# Altium PCB MATRIX_CLOCK.PcbDoc
Units mm, origin at the board's own origin, x right, y up, seen from the top; angles counter-clockwise.
Board outline 50.01 x 39.22 mm, 2 copper layers (Top Layer, Bottom Layer); 36 components, 29 nets, 152 pads, 86 vias.
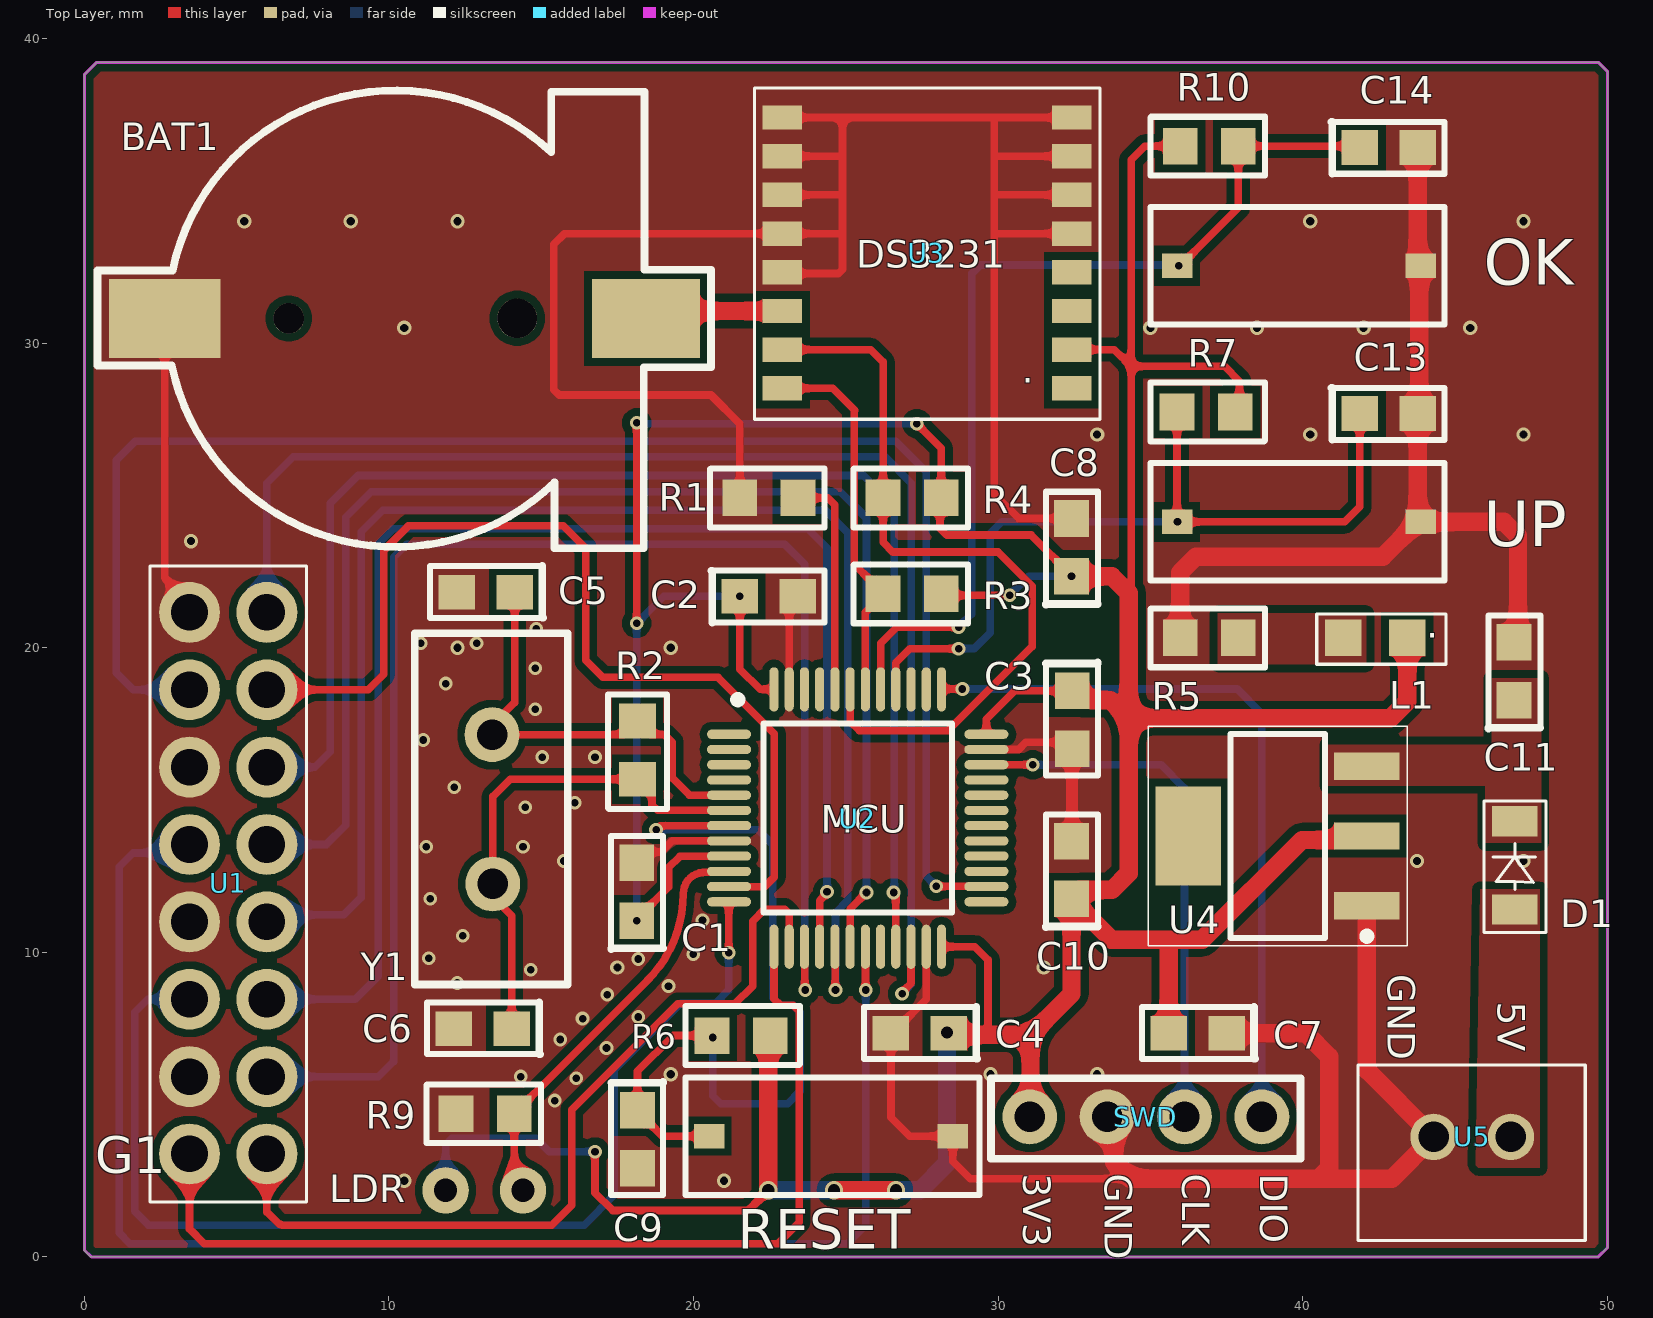
[diagram p0: Top Layer view]
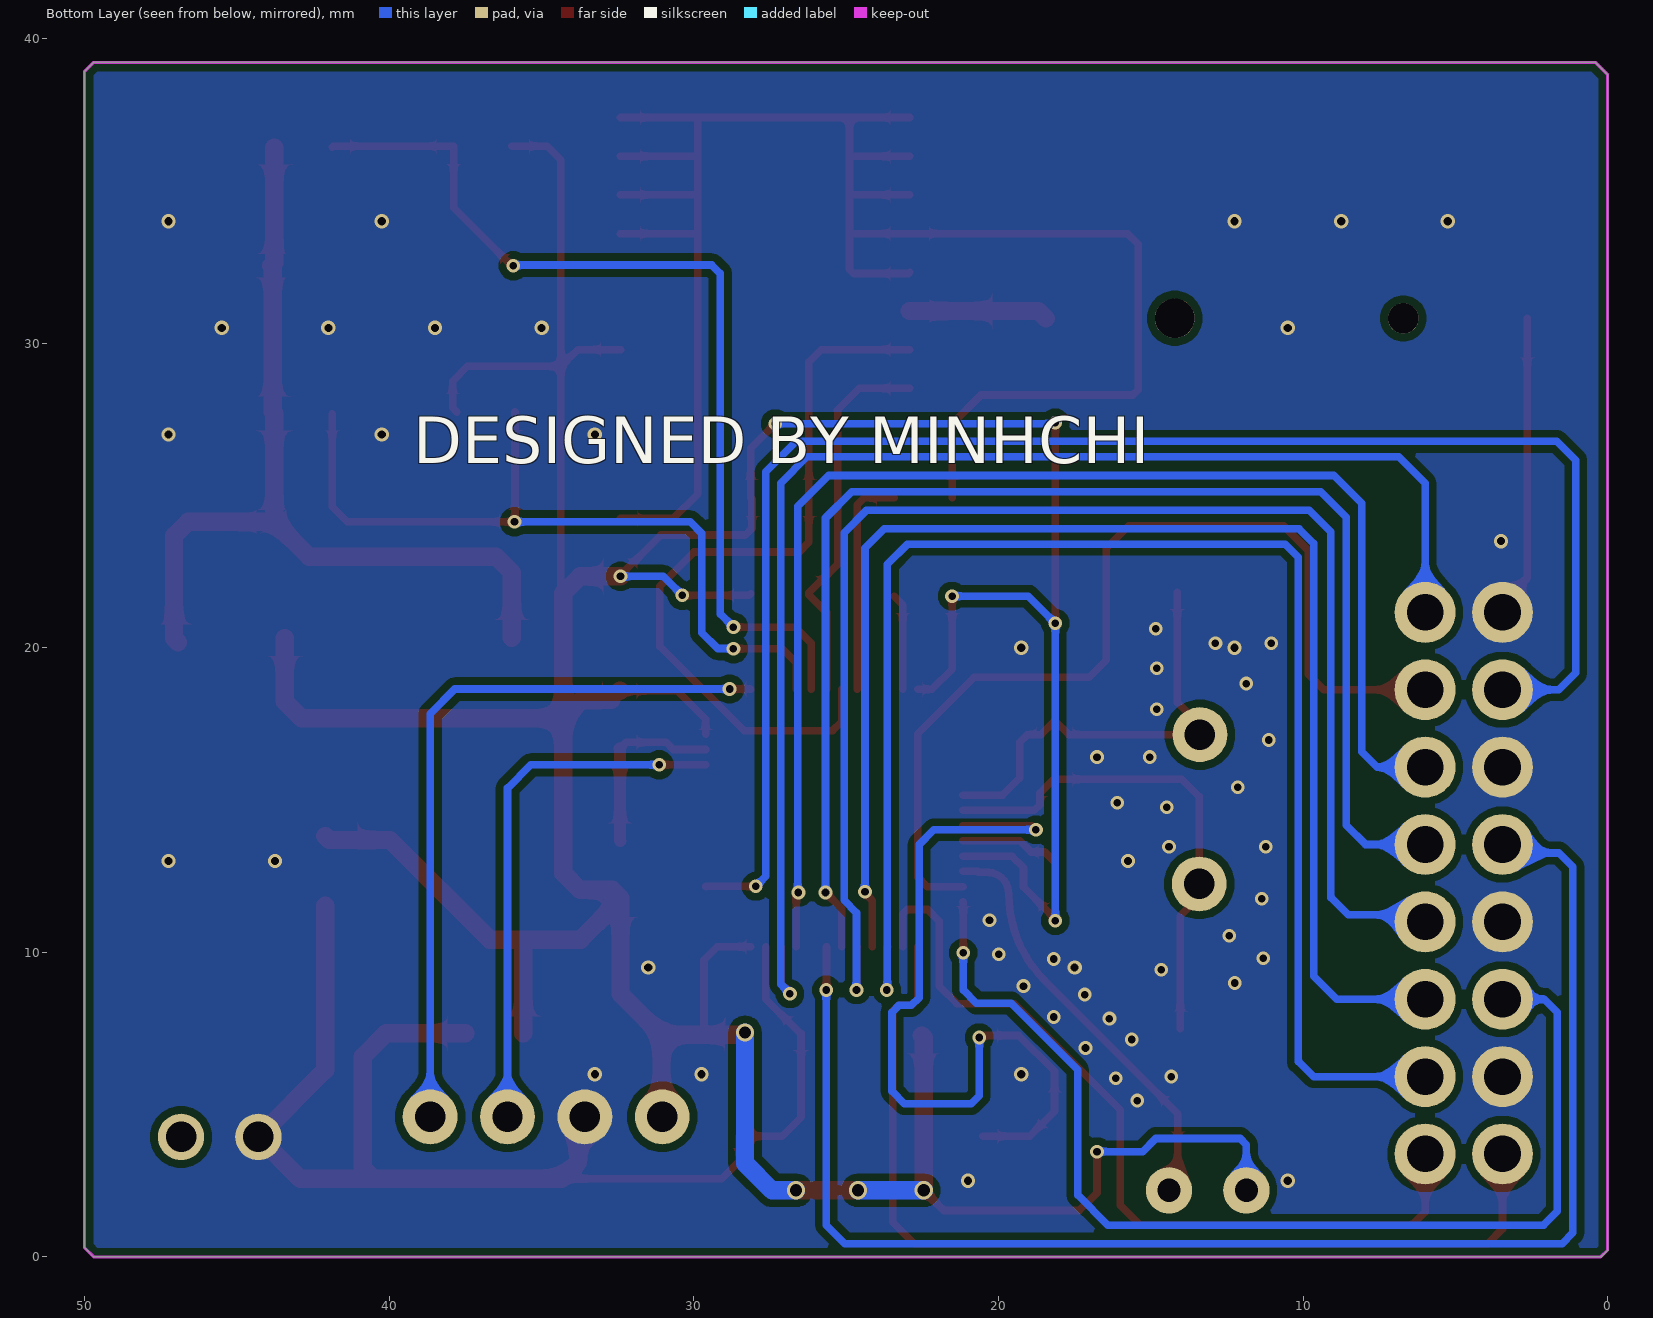
[diagram p1: Bottom Layer view, seen from below]
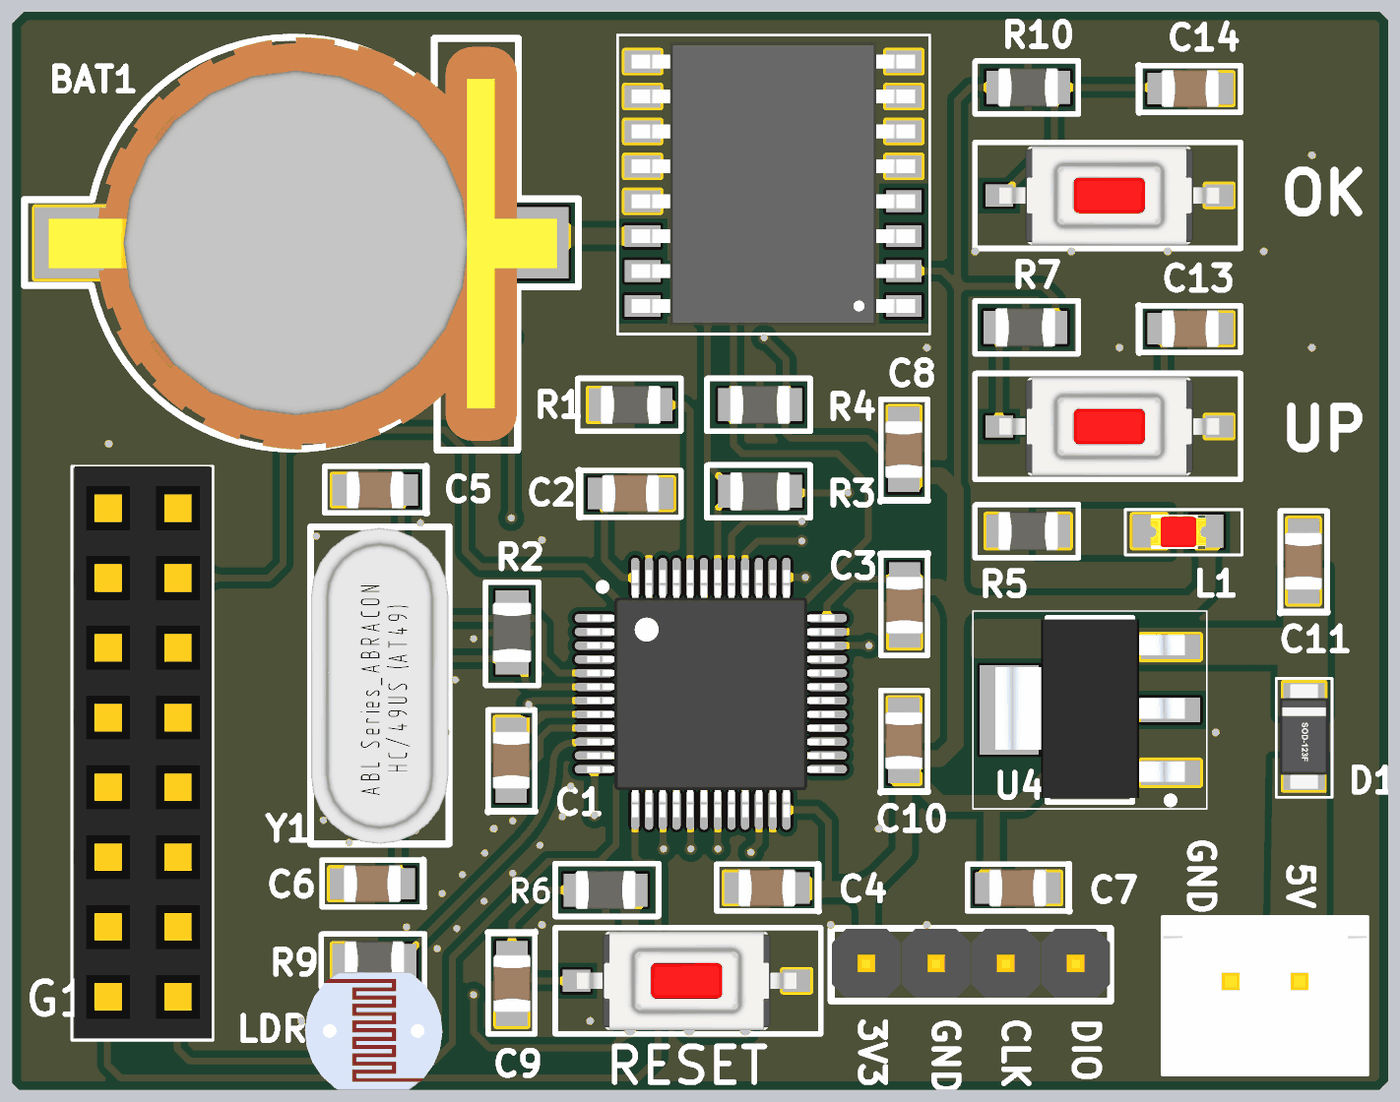
[diagram p2: 3D render of the assembled board from above, using the file's embedded part models]

## Layer stack, top to bottom
Top Solder: solder mask 0.0102, Solder Resist, Dk 3.5
Top Layer: signal copper 0.0356
Dielectric 1: dielectric 0.32, FR-4, Dk 4.8
Bottom Layer: signal copper 0.0356
Bottom Solder: solder mask 0.0102, Solder Resist, Dk 3.5

## Board outline
0.229,0 0,0.229 0,38.811 0.406,39.218 49.708,39.218 50.013,38.913 50.013,0.305 49.708,0

## Design rules (kind name [scope] priority, off if disabled: settings)
Clearance [All] p1: gap=0.25 ignorepadtopadclearanceinfootprint=FALSE
PolygonConnect [All] p1: connectstyle=Direct reliefconductorwidth=0.4 reliefentries=4 polygonreliefangle="90 Angle" airgapwidth=0.3
RoutingVias [All] p1: holewidth=0.25 width=0.45 viastyle="Through Hole" minholewidth=0.25 minwidth=0.45 maxholewidth=0.4 maxwidth=0.8
SolderMaskExpansion [All] p1: expansion=0.102 istentingtop=FALSE
Width [All] p1: maxlimit=0.6 minlimit=0.25 preferedwidth=0.4
30 further rules are at their usual default settings.

## Components (designator, comment, footprint, x,y, rotation, side; value= is the part's Value field where it differs from the comment)
BAT1 "BAT" CR11220 10.211,30.81 r0 top
C1 "104" CAP-0805 18.134,11.989 r90 top
C2 "104" CAP-0805 22.473,21.692 r0 top
C3 "104" CAP-0805 32.436,17.63 r270 top
C4 "104" CAP-0805 27.432,7.341 r180 top
C5 "20pF" CAP-0805 13.183,21.819 r180 top
C6 "20pF" CAP-0805 13.081,7.493 r180 top
C7 "104" CAP-0805 36.551,7.341 r180 top
C8 "104" CAP-0805 32.41,23.292 r90 top
C9 "104" CAP-0805 18.159,3.861 r270 top
C10 "10uF" CAP-0805 32.41,12.7 r90 top
C11 "10uF" CAP-0805 46.939,19.229 r90 top
C13 "104" CAP-0805 42.824,27.686 r0 top
C14 "104" CAP-0805 42.824,36.424 r0 top
D1 "IN5819" IN5819 46.965,11.405 r90 top
L1 "R" LED-R 43.433,20.32 r180 top
LDR "LDR" LDR2 14.402,2.184 r180 top (schematic designator R8)
OK "OK" BUTTON-2P-SMD 39.878,32.537 r0 top (schematic designator BT3)
R1 "10K" RES-0805 22.473,24.917 r0 top
R2 "1M" RES-0805 18.161,16.637 r90 top
R3 "10K" RES-0805 27.178,21.766 r0 top
R4 "10K" RES-0805 27.178,24.917 r0 top
R5 "510R" RES-0805 36.932,20.324 r0 top
R6 "10K" RES-0805 21.565,7.266 r180 top
R7 "10K" RES-0805 36.83,27.737 r180 top
R9 "10K" RES-0805 13.159,4.699 r0 top
R10 "10K" RES-0805 36.932,36.466 r0 top
RESET "RESET" BUTTON-2P-SMD 24.511,3.962 r180 top (schematic designator BT1)
SWD "HEADER-4P" HEADER-4P 31.039,4.596 r0 top
U1 "Header 16P" HEADER16P 5.994,3.378 r90 top
U2 "STM32F103" LQFP-48 25.391,14.407 r0 top
U3 "DS3231" SOIC16-W 32.411,37.405 r180 top
U4 "AMS1117" SOT-223 39.176,13.818 r180 top
U5 "CONNECTOR" XH-2P 46.838,3.937 r180 top
UP "UP" BUTTON-2P-SMD 39.878,24.13 r0 top (schematic designator BT2)
Y1 "8Mhz" QUARTZ 13.411,12.243 r90 top

## Footprints (in the part's own frame and the unit in brackets; to place one, negate y for a bottom-side part, rotate by r counter-clockwise, add the part's x,y. Pads: shape width x height; smd on the part's side, far side on the other; paste and mask are expansions set on the pad)
BUTTON-2P-SMD [mm] "3.5x6mm"
  rect 1x0.8 smd: 1(-4,0) 2(4,0)
  silkscreen extent -4.88,-1.93 4.78,1.93, body extent -4,-1.8 4,1.8, height 2.5
CAP-0805 [mm]
  rect 1.2x1.14 smd: 1(-0.95,0) 2(0.95,0)
  silkscreen extent -1.88,-0.86 1.83,0.84, body extent -1.05,-0.67 1.05,0.67, height 0.95
CR11220 [mm] "SMD"
  round 1.3 hole 1.3: 0.1(4,0)
  round 1 hole 1 paste+0 mask+0.102: 0.2(-3.5,0)
  rect 3.54x2.6 smd: 1(8.23,0)
  rect 3.66x2.6 smd: 2(-7.57,0)
  silkscreen extent -9.78,-7.54 10.36,7.48, body extent -8.9,-7.52 9.6,7.47, height 4.05
HEADER16P [mm] "DOUBLE"
  round 2 hole 1.2: 1(0,0) 2(0,2.54) 3(2.54,0) 4(2.54,2.54) 5(5.08,0) 6(5.08,2.54) 7(7.62,0) 8(7.62,2.54) 9(10.16,0) 10(10.16,2.54) 11(12.7,0) 12(12.7,2.54) 13(15.24,0) 14(15.24,2.54) 15(17.78,0) 16(17.78,2.54)
  silkscreen extent -1.57,-1.3 19.3,3.84, body extent -1.52,-1.25 19.3,3.75, height 8.5
HEADER-4P [mm] "DIP"
  round 1.8 hole 1: 1(0,0) 2(2.54,0) 3(5.08,0) 4(7.62,0)
  silkscreen extent -1.27,-1.37 8.89,1.27, body extent -1.25,-1.25 8.87,1.25, height 8.54
IN5819 [mm] "SMD"
  rect 1x1.5 smd: 1(0,0) 2(2.9,0)
  silkscreen extent -0.76,-1.02 3.56,1.02, body extent -0.45,-0.9 3.35,0.9, height 1.02
LDR2 [mil]
  round 60 hole 30: 1(0,0) 2(100,0)
  body extent -48,-83 148,87, height 276
LED-R [mm] "0805"
  rect 1.2x1.2 smd: 1(0,0) 2(2.1,0)
  silkscreen extent -1.27,-0.79 2.97,0.86, body extent 0.03,-0.6 2.05,0.65, height 1.1
LQFP-48 [mm] "SMD"
  oval 1.45x0.3 smd: 1(-4.225,2.75) 2(-4.225,2.25) 3(-4.225,1.75) 4(-4.225,1.25) 5(-4.225,0.75) 6(-4.225,0.25) 7(-4.225,-0.25) 8(-4.225,-0.75) 9(-4.225,-1.25) 10(-4.225,-1.75) 11(-4.225,-2.25) 12(-4.225,-2.75) 25(4.225,-2.75) 26(4.225,-2.25) 27(4.225,-1.75) 28(4.225,-1.25) 29(4.225,-0.75) 30(4.225,-0.25) 31(4.225,0.25) 32(4.225,0.75) 33(4.225,1.25) 34(4.225,1.75) 35(4.225,2.25) 36(4.225,2.75)
  oval 0.3x1.45 smd: 13(-2.75,-4.225) 14(-2.25,-4.225) 15(-1.75,-4.225) 16(-1.25,-4.225) 17(-0.75,-4.225) 18(-0.25,-4.225) 19(0.25,-4.225) 20(0.75,-4.225) 21(1.25,-4.225) 22(1.75,-4.225) 23(2.25,-4.225) 24(2.75,-4.225) 37(2.75,4.225) 38(2.25,4.225) 39(1.75,4.225) 40(1.25,4.225) 41(0.75,4.225) 42(0.25,4.225) 43(-0.25,4.225) 44(-0.75,4.225) 45(-1.25,4.225) 46(-1.75,4.225) 47(-2.25,4.225) 48(-2.75,4.225)
  silkscreen extent -4.06,-3.1 3.1,4.01, body extent -4.5,-4.5 4.5,4.5, height 1.6
QUARTZ [mm] "8MHZ-DIP"
  round 1.8 hole 1: 1(0,0) 2(4.902,0.025)
  silkscreen extent -3.3,-2.46 8.23,2.57, body extent -3.3,-2.44 8.2,2.56, height 3.51
RES-0805 [mm]
  rect 1.14x1.2 smd: 1(-0.955,0) 2(0.955,0)
  silkscreen extent -1.93,-0.97 1.83,0.97, body extent -1.1,-0.7 1.1,0.7, height 1.3
SOIC16-W [mm] "SMD"
  rect 1.3x0.8 smd: 1(0,8.89) 2(0,7.62) 3(0,6.35) 4(0,5.08) 5(0,3.81) 6(0,2.54) 7(0,1.27) 8(0,0) 9(9.5,0) 10(9.5,1.27) 11(9.5,2.54) 12(9.5,3.81) 13(9.5,5.08) 14(9.5,6.35) 15(9.5,7.62) 16(9.5,8.89)
  silkscreen extent -0.94,-0.97 10.41,9.91, body extent -0.4,-0.7 9.9,9.59, height 2.65
SOT-223 [mm]
  rect 2.15x0.9 smd: 1(-2.93,2.29) 2(-2.93,0) 3(-2.93,-2.29)
  rect 2.15x3.25 smd: 4(2.93,0)
  silkscreen extent -4.25,-3.6 4.25,3.6, body extent -3.45,-3.3 3.45,3.2, height 1.7
XH-2P [mil]
  round 60 hole 39.37: 1(0,0) 2(100,0)
  silkscreen extent -96,-93 198,134, body extent -95,-93 196,134, height 276

## Part data
BAT1: library part BAT_CR1220
C1 C2 C3 C4 C5 C6 C7 C8 C9 C10 C11 C13 C14: library part CAP-NON
D1: library part DIODE
L1: library part LED-SINGLE
OK RESET UP: library part BUTON-2P
R1 R2 R3 R4 R5 R6 R7 R9 R10: library part RES
U1: library part "CONNECTOR 16P"
U2: library part STM32F103_MCU
U4: library part AMS1117_SOT-232
U5: library part XH-2P
Y1: library part Quartz

## Via types
v1: diameter 0.45, hole 0.25, Top Layer to Bottom Layer, tented both sides, 56 vias
v2: diameter 0.47, hole 0.27, Top Layer to Bottom Layer, tented both sides, 26 vias
v3: diameter 0.6, hole 0.4, Top Layer to Bottom Layer, tented both sides, 4 vias

## Nets (pads, with @x,y where several pads share a name; then routed paths per layer and width w, separated by ;. In a path a pad name is that pad's centre, name@x,y a point inside that pad or via, vN(x,y) a via of type N, cw(c..) or ccw(c..) an arc to the next point about the centre after c; other vN are vias at no path point)
3V3: C1.1 C2.1 C3.1 C4.1 C7.2 C8.1 C10.1 L1.1 LDR.2 R3.2 R4.2 R6.1 R7.1 R10.1 SWD.1 U2.9 U2.24 U2.36 U2.48 U3.2 U4.2 | length 163.6
  Top Layer w0.25: v1(16.764,3.454) 16.764,2.108 17.348,1.524 21.793,1.524 v3(22.454,2.184) ; v1(18.134,11.039) cw(c18.277,11.039) 18.176,11.14 19.177,12.141 19.177,12.776 19.558,13.157 U2.9 ; v1(18.134,20.801) v1@18.134,27.381 ; v1(21.523,21.692) 21.523,19.294 22.186,18.632 U2.48 ; v1(27.33,27.356) 28.133,26.553 R4.2 28.092,24.877 28.092,23.927 28.321,23.698 31.084,23.698 32.41,22.372 v1(32.41,22.342) ; R3.2 28.182,21.717 v1(30.378,21.717) ; U2.24 29.239,10.182 29.667,9.754 29.667,7.595 29.388,7.315 ; U2.36 29.616,17.653 30.543,18.58 C3.1 ; U3.2 33.817,29.785 34.366,29.235 ; 34.29,21.793 34.366,21.869 34.366,29.235 ; R10.1 34.815,36.466 34.366,36.017 34.366,29.235 ; R7.1 37.922,27.874 37.922,28.753 37.44,29.235 34.366,29.235
  Top Layer w0.6: v3(22.454,2.184) 22.454,7.2 R6.1 ; v3(24.613,2.184) v3(26.645,2.184) ; C4.1@28.382,7.351 C4.1 28.433,7.29 31.064,7.29 ; SWD.1 31.064,4.621 31.064,7.29 ; v1(32.41,22.342) 33.741,22.342 34.29,21.793 34.29,17.683 ; C3.1@32.423,18.593 C3.1 ; C3.1@32.706,18.28 33.693,18.28 34.29,17.683 ; C7.2 35.601,10.373 35.56,10.414 ; U4.2 41.977,13.688 39.977,13.688 36.703,10.414 35.56,10.414 ; L1.1 43.433,18.236 42.879,17.683 34.29,17.683 ; 31.064,7.29 32.41,8.636 C10.1@32.41,11.72 ; C10.1@32.41,11.72 C10.1 32.41,11.78 32.68,12.05 33.742,12.05 34.29,12.598 34.29,17.683 ; C10.1@32.41,11.72 33.716,10.414 35.56,10.414
  Bottom Layer w0.25: LDR.2 11.862,3.683 12.065,3.886 14.834,3.886 15.265,3.454 v1(16.764,3.454) ; v1(18.134,11.039) v1(18.134,20.801) 19.025,21.692 v1(21.523,21.692) ; v1@18.145,27.356 v1(27.33,27.356) ; v1(30.378,21.717) 31.003,22.342 v1(32.41,22.342)
  Bottom Layer w0.6: v3(22.454,2.184) v3(24.613,2.184) ; v3(26.645,2.184) 27.432,2.184 28.321,3.073 v3(28.321,7.366)
  other v1: 18.136,27.381
+5: D1.1 U5.1
A: U1.9 U2.18 | length 44.6
  Top Layer w0.25: U2.18 25.141,11.425 v1(25.679,11.963)
  Bottom Layer w0.25: U1.9@6.502,13.538 7.95,13.538 8.585,14.173 8.585,24.282 9.423,25.121 24.816,25.121 25.679,24.257 v1(25.679,11.963)
A0: LDR.1 R9.2 U2.10 | length 14.2
  Top Layer w0.25: LDR.1@14.402,1.956 cw(c14.402,2.244) 14.114,2.244 R9.2 18.476,9.061 ccw(c15.608,11.931) 19.665,11.928 cw(c20.357,11.93) 20.306,12.619 20.67,12.635 20.67,12.657 U2.10
B: U1.10 U2.19 | length 48.7
  Top Layer w0.25: U2.19 25.648,10.176 25.648,8.769 v1(25.654,8.763)
  Bottom Layer w0.25: U1.10 3.175,13.26 1.601,13.26 1.143,12.802 1.143,0.787 1.499,0.432 25.044,0.432 25.654,1.041 v1(25.654,8.763)
B1: U1.3 U2.15 | length 49.7
  Top Layer w0.25: U2.15 23.651,10.173 23.651,8.785 v1(23.673,8.763)
  Bottom Layer w0.25: U1.3@6.502,5.918 9.652,5.918 10.135,6.401 ; 10.16,6.401 10.16,22.962 10.592,23.393 22.987,23.393 23.647,22.733 v1@23.647,8.763
B2: U1.7 U2.17 | length 48.1
  Top Layer w0.25: U2.17 24.651,10.173 24.651,8.775 v1(24.663,8.763)
  Bottom Layer w0.25: U1.7@6.502,10.998 6.733,11.229 8.512,11.229 9.068,11.786 ; 9.093,11.786 9.093,23.8 9.804,24.511 24.333,24.511 25.07,23.774 25.07,11.709 24.663,11.303 v1(24.663,8.763)
C: U1.11 U2.21 | length 44.1
  Top Layer w0.25: v1@26.568,11.909 v1(26.568,11.963) ; U2.21 v1@26.641,11.836
  Bottom Layer w0.25: U1.11 7.569,16.078 8.077,16.586 8.077,24.74 8.992,25.654 25.578,25.654 26.594,24.638 v1@26.594,11.963
CLK: U1.13 U2.11 | length 32.6
  Top Layer w0.25: U1.13 9.322,18.618 9.83,19.126 9.83,23.19 10.643,24.003 15.723,24.003 16.459,23.266 16.459,19.583 17.018,19.025 20.803,19.025 22.657,17.17 22.657,12.471 22.343,12.157 U2.11
G1: U1.2 U2.13 | length 32.7
  Top Layer w0.25: U1.2 3.454,0.915 3.937,0.432 22.758,0.432 23.47,1.143 23.47,8.058 23.272,8.255 22.86,8.255 22.641,8.474 U2.13
  Bottom Layer w0.25: U1.2@3.886,3.303 U1.2@3.962,3.378
G2: U1.6 U2.12 | length 36.7
  Top Layer w0.25: v1(21.158,9.982) 21.158,11.649 U2.12
  Bottom Layer w0.25: U1.6 2.083,8.458 1.651,8.026 1.651,1.499 2.108,1.041 16.408,1.041 17.399,2.032 17.399,6.147 19.583,8.331 20.726,8.331 21.158,8.763 v1(21.158,9.982)
GND: BAT1.2 C1.2 C2.2 C3.2 C4.2 C5.2 C6.2 C7.1 C8.2 C9.2 C10.2 C11.2 C13.2 C14.2 OK.2 R1.1 R5.1 R9.1 RESET.1 SWD.2 U1.4 U1.8 U1.12 U1.16 U2.8 U2.23 U2.35 U2.47 U3.5 U3.6 U3.7 U3.8 U3.9 U3.10 U3.11 U3.12 U3.13 U4.1 U5.2 UP.2 | length 164.1
  Top Layer w0.25: BAT1.2 2.641,22.29 3.454,21.477 U1.16 ; C1.2 18.489,13.294 18.933,13.294 19.296,13.657 U2.8 ; R1.1 21.518,27.351 20.574,28.296 15.596,28.296 15.418,28.473 15.418,33.249 15.764,33.595 U3.12 24.876,33.595 24.892,33.579 ; U3.13 22.953,32.283 24.746,32.283 24.892,32.43 24.892,33.579 ; U3.11 24.825,34.865 24.892,34.798 ; U3.10 24.859,36.135 24.892,36.101 ; U3.9 24.892,37.405 ; U2.47 23.141,21.41 C2.2 ; U2.23 27.635,10.176 27.635,8.464 26.512,7.341 C4.2 26.482,4.582 27.102,3.962 RESET.1 28.511,3.137 29.083,2.565 34.341,2.565 ; U2.35 30.678,16.657 30.912,16.891 32.225,16.891 C3.2 ; C8.2 30.673,24.242 29.87,25.044 29.87,33.579 ; U3.5 29.886,33.595 29.87,33.579 ; U3.6 29.88,34.865 29.87,34.874 ; U3.7 29.88,36.135 29.87,36.144 ; U3.8 29.937,37.405 ; 24.892,33.579 24.892,34.798 ; 24.892,34.798 24.892,36.101 ; 24.892,36.101 24.892,37.405 ; 24.892,37.405 29.937,37.405 ; 29.87,33.579 29.87,34.874 ; 29.87,34.874 29.87,36.144 ; 29.87,36.144 29.87,37.338 29.937,37.405
  Top Layer w0.4: C10.2 32.423,13.663 32.423,16.667 C3.2
  Top Layer w0.6: SWD.2@33.716,4.733 SWD.2 33.808,4.366 33.808,3.098 34.341,2.565 40.517,2.565 ; R5.1 35.977,22.464 36.5,22.987 42.635,22.987 43.778,24.13 UP.2@43.874,24.13 ; C7.1 40.107,7.341 40.869,6.579 40.869,2.917 40.517,2.565 ; U4.1 42.106,6.128 U5.2 42.926,2.565 40.517,2.565 ; C14.2 43.774,32.637 43.874,32.537 OK.2 43.826,32.486 43.826,27.738 C13.2 43.774,24.23 UP.2@43.874,24.13 ; C11.2 47.066,20.306 47.066,23.673 46.609,24.13 UP.2 UP.2@43.874,24.13
  other v1: 15.443,5.131 16.154,5.867 14.326,5.918 17.145,6.858 15.621,7.137 16.358,7.823 18.186,7.874 17.17,8.611 19.177,8.89 12.243,8.992 14.656,9.423 18.186,9.779 11.303,9.804 19.99,9.931 12.421,10.541 20.295,11.049 11.354,11.76 11.227,13.462 14.402,13.462 14.478,14.757 16.104,14.91 12.141,15.418 15.037,16.408 16.764,16.408 11.125,16.967 14.808,17.983 11.862,18.821 14.808,19.329 11.049,20.142 12.878,20.142 14.834,20.625
  other v2: 10.5,2.499 21,2.499 19.25,5.999 29.75,5.999 33.25,5.999 17.5,9.499 31.5,9.499 15.75,12.999 43.75,12.999 47.25,12.999 12.25,19.999 19.25,19.999 3.5,23.499 33.25,26.999 40.25,26.999 47.25,26.999 10.5,30.499 35,30.499 38.5,30.499 42,30.499 45.5,30.499 5.25,33.999 8.75,33.999 12.25,33.999 40.25,33.999 47.25,33.999
LAT: U1.14 U2.26 | length 52.3
  Top Layer w0.25: v1(27.965,12.167) 27.97,12.162 29.612,12.162 U2.26
  Bottom Layer w0.25: U1.14 1.6,18.618 1.046,19.173 1.046,26.149 1.669,26.772 26.645,26.772 27.635,25.781 27.635,12.497 v1(27.965,12.167)
NetBAT1_1: BAT1.1 U3.14 | length 4.6
  Top Layer w0.6: BAT1.1 18.685,31.055 U3.14
NetC5_1: C5.1 R2.2 U2.5 Y1.2 | length 14.6
  Top Layer w0.25: C5.1 14.133,18.201 13.386,17.455 Y1.2 17.684,17.145 18.131,17.592 R2.2 18.606,17.147 19.048,17.147 19.304,16.891 19.304,15.723 19.869,15.157 U2.5
NetC6_1: C6.1 R2.1 U2.6 Y1.1 | length 16.5
  Top Layer w0.25: C6.1 14.031,11.204 13.411,11.823 Y1.1 13.411,15.113 13.98,15.682 R2.1 18.191,15.682 18.636,15.237 18.636,14.841 18.82,14.657 U2.6
NetC11_1: C11.1 D1.2 U4.3
NetL1_2: L1.2 R5.2
NetR1_2: R1.2 U2.44 | length 7.4
  Top Layer w0.25: R1.2 24.409,24.917 24.638,24.689 24.638,18.636 U2.44
NRST: C9.1 R6.2 RESET.2 U2.7 | length 27.3
  Top Layer w0.25: v1@18.72,14.021 18.774,14.021 18.91,14.157 U2.7 ; RESET.2 18.978,3.962 18.159,4.781 C9.1 18.159,6.094 19.331,7.266 R6.2
  Bottom Layer w0.25: v1@18.72,14.021 22.123,14.021 22.606,13.538 22.606,8.509 22.86,8.255 23.266,8.255 23.495,8.026 23.495,5.436 23.089,5.029 20.898,5.029 20.631,5.296 v1(20.631,7.202)
  other v1: 18.771,14.021
OE: U1.15 U2.22 | length 44.7
  Top Layer w0.25: v1(26.848,8.636) 26.848,8.69 27.141,8.984 U2.22
  Bottom Layer w0.25: U1.15 5.994,25.399 6.857,26.263 26.29,26.263 27.153,25.4 27.153,8.959 26.848,8.654 v1(26.848,8.636)
OK: C14.1 OK.1 R10.2 U2.41 | length 31.8
  Top Layer w0.25: U2.41 26.141,20.147 26.67,20.676 v1(28.702,20.676) ; v1(35.928,32.537) 35.978,32.537 37.887,34.446 R10.2 41.832,36.466 C14.1
  Bottom Layer w0.25: v1(28.702,20.676) 29.134,21.107 29.134,32.283 29.413,32.563 35.903,32.563 v1(35.928,32.537)
R1: U1.1 U2.14 | length 27.7
  Top Layer w0.25: U1.1 5.994,1.474 6.401,1.067 6.452,1.067 6.477,1.041 15.342,1.041 16.002,1.702 16.002,4.826 19.482,8.306 21.361,8.306 21.946,8.89 21.946,11.024 22.327,11.405 22.995,11.405 23.141,11.258 U2.14
R2: U1.5 U2.16 | length 46
  Top Layer w0.25: U2.16 24.141,11.692 24.384,11.935 v1(24.384,11.989)
  Bottom Layer w0.25: U1.5@6.502,8.458 8.89,8.458 9.652,9.22 9.652,23.419 10.135,23.901 23.749,23.901 24.384,23.266 v1(24.384,11.989)
SCL: R3.1 U2.42 U3.16 | length 12.5
  Top Layer w0.25: U3.16 24.571,28.515 25.298,27.788 ; 25.273,22.721 25.273,27.788 ; 25.298,22.721 26.223,21.796 R3.1 26.223,21.736 25.641,21.155 U2.42
SDA: R4.1 U2.43 U3.15 | length 25.2
  Top Layer w0.25: U3.15 25.816,29.785 26.223,29.378 R4.1 26.223,23.459 26.543,23.139 29.997,23.139 31.115,22.022 31.115,20.041 28.346,17.272 25.451,17.272 25.151,17.572 25.151,18.623 U2.43
SWCLK: SWD.4 U2.37 | length 24.1
  Top Layer w0.25: U2.37 28.153,18.644 v1(28.829,18.644)
  Bottom Layer w0.25: v1(28.829,18.644) 37.846,18.644 38.659,17.831 SWD.4
SWDIO: SWD.3 U2.34 | length 17.6
  Top Layer w0.25: U2.34 29.618,16.156 31.139,16.156 v1(31.14,16.154)
  Bottom Layer w0.25: v1(31.14,16.154) 35.357,16.154 36.119,15.392 SWD.3
UP: C13.1 R7.2 U2.40 UP.1 | length 26.8
  Top Layer w0.25: U2.40 26.641,19.504 27.102,19.964 v1(28.702,19.964) ; R7.2 35.875,24.133 UP.1 ; v1(35.89,24.13) UP.1 ; C13.1 41.874,24.628 41.377,24.13 UP.1
  Bottom Layer w0.25: v1(28.702,19.964) 28.711,19.974 29.219,19.974 29.743,20.498 29.743,23.749 30.124,24.13 v1(35.89,24.13)
pads on no net: BAT1.0.1 BAT1.0.2 U2.1 U2.2 U2.3 U2.4 U2.20 U2.25 U2.27 U2.28 U2.29 U2.30 U2.31 U2.32 U2.33 U2.38 U2.39 U2.45 U2.46 U3.1 U3.3 U3.4 U4.4

## Polygon pours and split planes (outlines as drawn)
GND on Top Layer "GND_L01_P017" (solid, remove dead copper, pour order 17): 0.229,0 0,0.229 0,38.811 0.406,39.218 49.708,39.218 50.013,38.913 50.013,0.305 49.708,0
NetC11_1 on Top Layer "NETC11_1_L01_P014" (solid, pour order 14): 46.203,18.999 46.253,18.999 47.828,18.999 47.828,13.589 45.999,13.589 45.999,15.469 40.818,15.469 40.818,16.815 46.203,16.815
NetL1_2 on Top Layer "NETL1_2_L01_P013" (solid, pour order 13): 37.211,21.133 42.088,21.133 42.088,19.456 37.211,19.456
+5 on Top Layer "+5_L01_P010" (solid, pour order 10): 47.777,12.065 47.777,11.887 47.777,2.921 45.679,2.921 45.822,12.065
GND on Top Layer "GND_L01_P000" (solid, pour order 0): 20.45,15.512 20.171,15.512 19.892,15.792 19.892,17.218 19.485,17.624 19.485,18.56 17.018,18.56 17.018,17.907 15.421,17.907 15.421,22.809 11.43,22.809 11.43,20.973 10.849,20.973 10.849,8.705 11.281,8.705 11.281,6.452 15.243,6.452 15.243,14.445 20.45,14.445
GND on Bottom Layer "GND_L02_P016" (solid, remove dead copper, pour order 16): 0.229,0 0,0.229 0,38.811 0.406,39.218 49.708,39.218 50.013,38.913 50.013,0.305 49.708,0

## Keep-outs
Keep-Out Layer:
  the board outline again, w0.1

## Silkscreen, mask and mechanical layers (free items; w line width, h text height)
Top Overlay:
  text "GND" at 42.796,9.274 h0.9 r270
  text "5V" at 46.403,8.374 h0.9 r270
  text "G1" at 0.352,2.74 h1.2
  text "3V3" at 30.832,2.721 h0.9 r270
  text "GND" at 33.499,2.721 h0.9 r270
  text "CLK" at 36.039,2.721 h0.9 r270
  text "DIO" at 38.605,2.721 h0.9 r270
Bottom Overlay:
  text "DESIGNED BY MINHCHI" at 39.218,26.06 h1.52

## Text inside footprints (layer, text, board x,y; h text height)
U2: Top Overlay "MCU" at 24.178,13.916 h0.9